# Altium PCB spider.PcbDoc
Units mm, origin at the board's own origin, x right, y up, seen from the top; angles counter-clockwise.
Board outline 30.2 x 24 mm, 2 copper layers (Top Layer, Bottom Layer), stack 1.601 mm thick; 61 components, 42 nets, 209 pads, 87 vias.
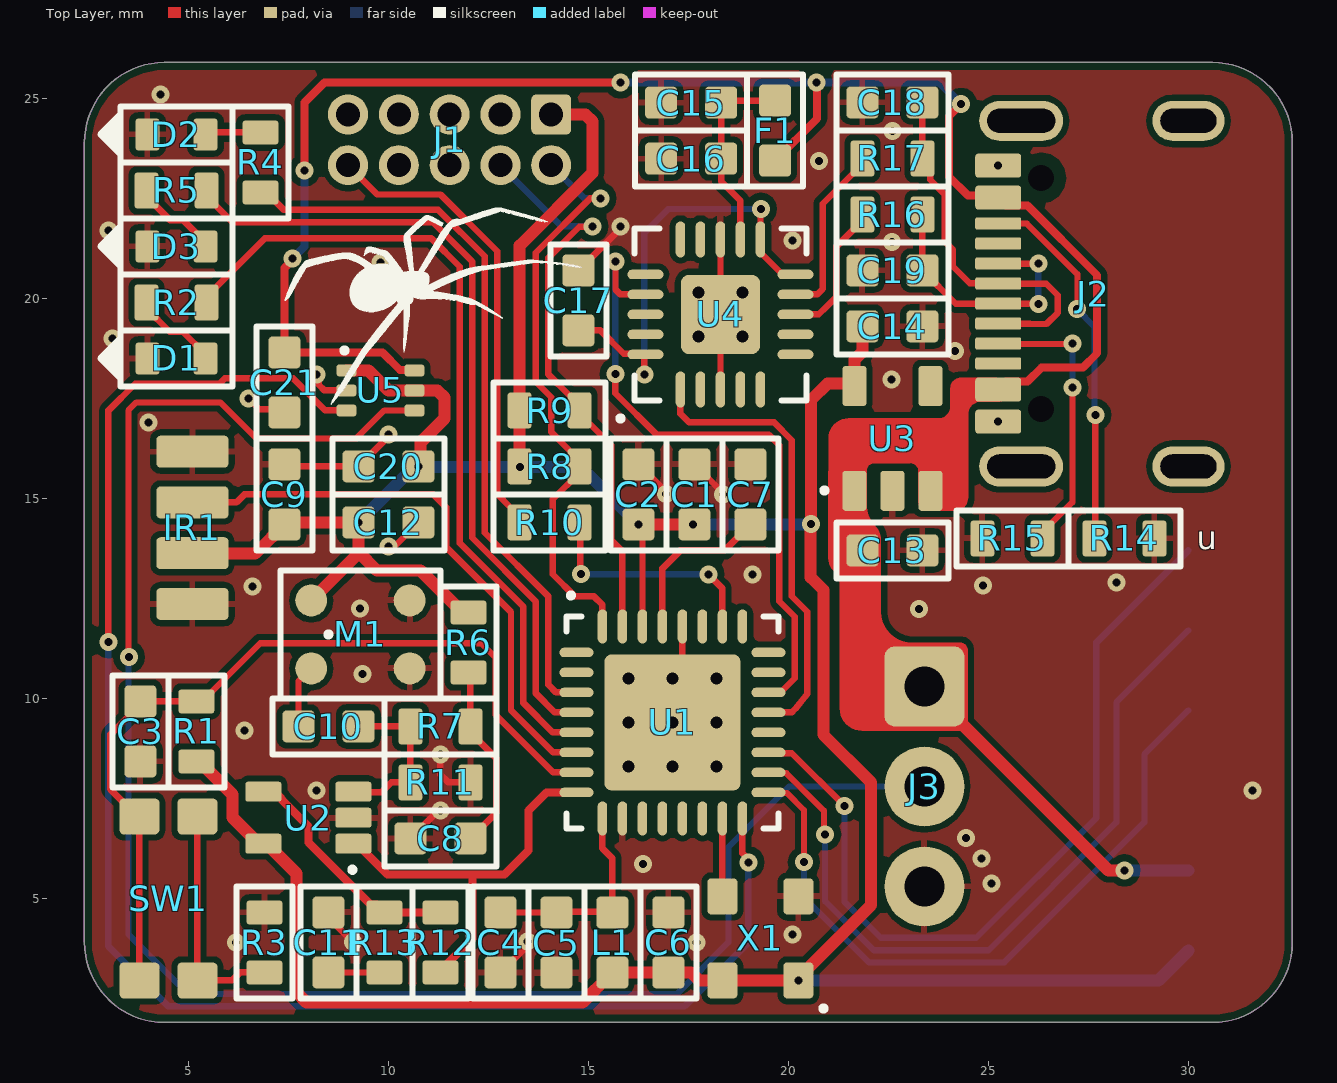
[diagram p0: Top Layer view]
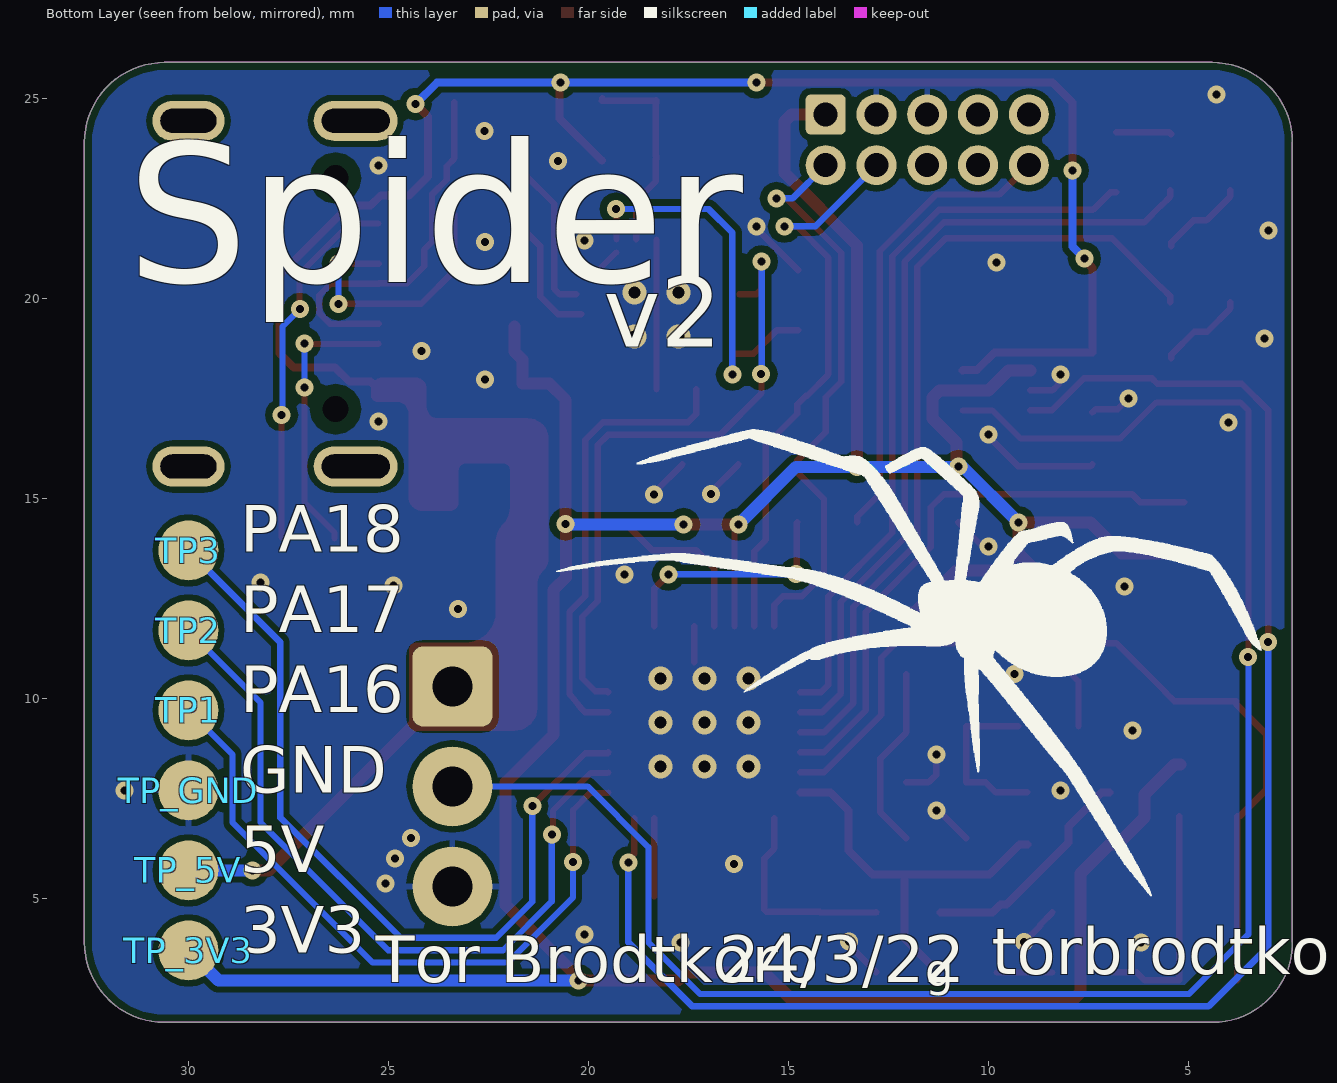
[diagram p1: Bottom Layer view, seen from below]
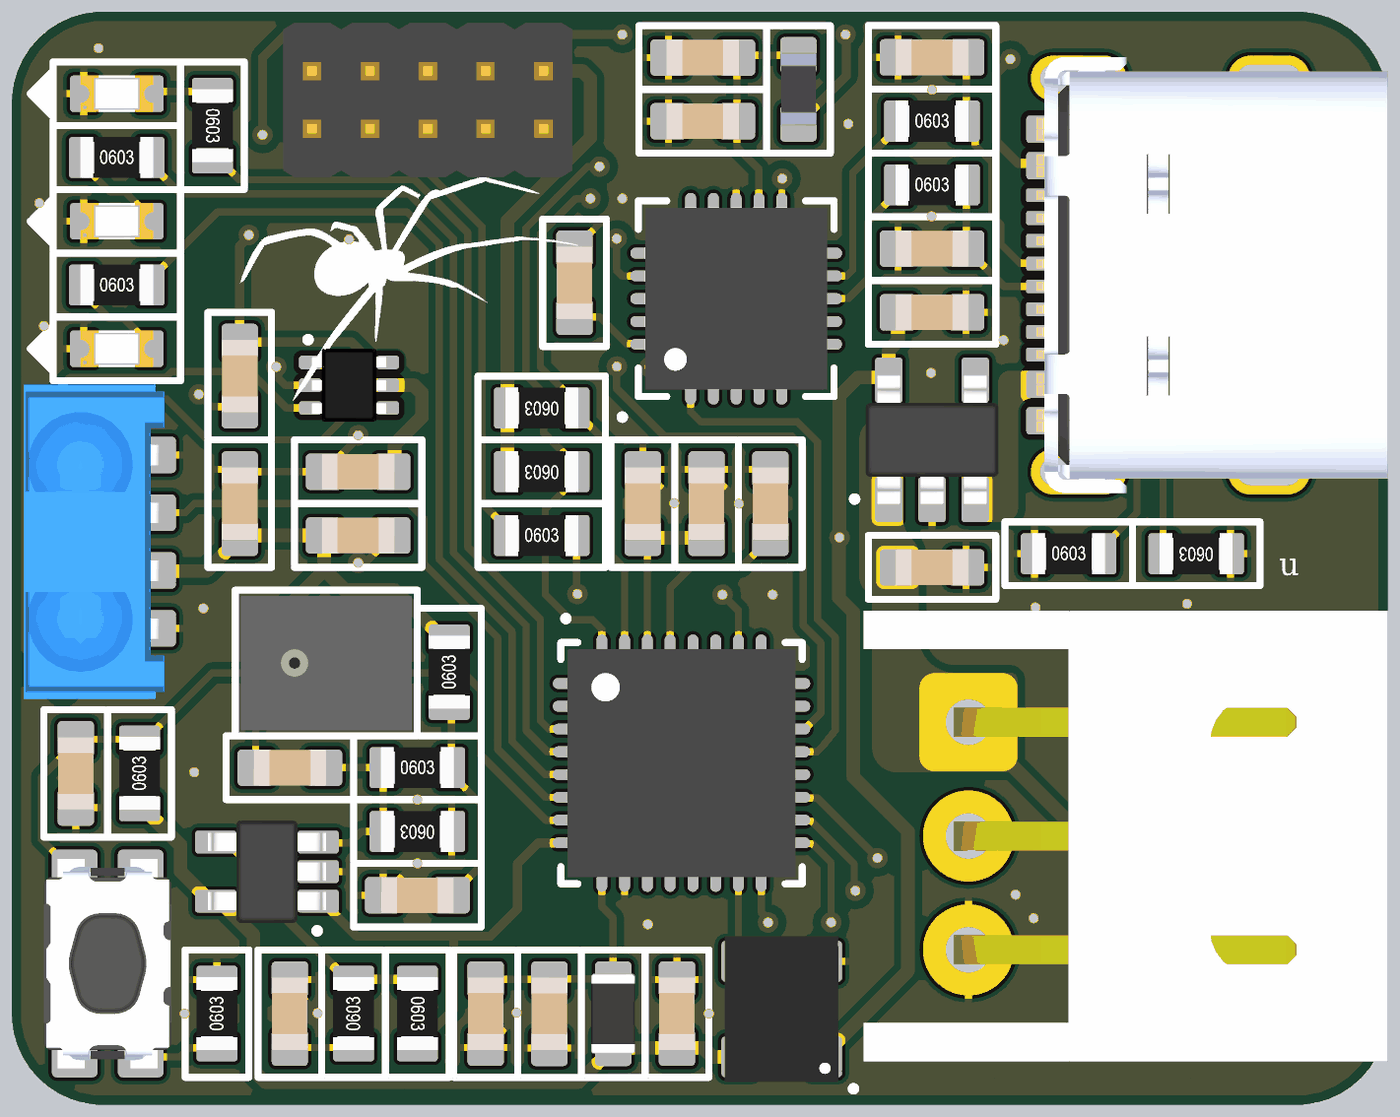
[diagram p2: 3D render of the assembled board from above, using the file's embedded part models]

## Layer stack, top to bottom
Top Solder: solder mask 0.0102, Solder Resist, Dk 3.5
Top Layer: signal copper 0.0356
Dielectric 1: dielectric 1.53, FR-4, Dk 4.8
Bottom Layer: signal copper 0.0356
Bottom Solder: solder mask 0.0102, Solder Resist, Dk 3.5

## Board outline
2.4,3.9 ccw(c4.4,3.9) 4.4,1.9 30.6,1.9 ccw(c30.6,3.9) 32.6,3.9 32.6,23.9 ccw(c30.6,23.9) 30.6,25.9 4.4,25.9 ccw(c4.4,23.9) 2.4,23.9

## Design rules (kind name [scope] priority, off if disabled: settings)
BoardOutlineClearance [All] p1: gap=0.198 ignorepadtopadclearanceinfootprint=FALSE except(0: Arc-SplitContinuation Track-SplitContinuation SMDPad-SplitContinuation THPad-SplitContinuation Via-SplitContinuation Fill-SplitContinuation Poly-SplitContinuation Region-SplitContinuation Text-SplitContinuation)
Clearance [All] p1: gap=0.152 ignorepadtopadclearanceinfootprint=TRUE except(0.305: Arc-Hole Track-Hole SMDPad-Hole THPad-Hole Via-Hole Fill-Hole Poly-Hole Region-Hole Text-Hole)
ComponentClearance [All] p1: gap=0.1 collisioncheckmode=3 verticalgap=0.1 showdistances=FALSE
DiffPairsRouting DiffPairsRouting_USB [InDifferentialPair('USB')] p1: maxlimit=0.5 minlimit=0.16 mostfreqgap=0.2 toplayer_minwidth=0.16 toplayer_maxwidth=5 toplayer_prefwidth=0.265 bottomlayer_minwidth=0.16 bottomlayer_maxwidth=5 bottomlayer_prefwidth=0.265 maxuncoupledlength=12.7
DiffPairsRouting DiffPairsRouting_ETH [InDifferentialPair('ETH_RX') or InDifferentialPair('ETH_TX')] p2: maxlimit=0.5 minlimit=0.16 mostfreqgap=0.194 toplayer_minwidth=0.16 toplayer_maxwidth=5 toplayer_prefwidth=0.22 bottomlayer_minwidth=0.16 bottomlayer_maxwidth=5 bottomlayer_prefwidth=0.22 maxuncoupledlength=12.7
DiffPairsRouting [All] p3: maxlimit=0.5 minlimit=0.16 mostfreqgap=0.3 toplayer_minwidth=0.16 toplayer_maxwidth=5 toplayer_prefwidth=0.3 bottomlayer_minwidth=0.16 bottomlayer_maxwidth=5 bottomlayer_prefwidth=0.3 maxuncoupledlength=12.7
HoleSize [All] p1: absolutevalues=TRUE maxlimit=6.3 minlimit=0.025 maxpercent=80.000 minpercent=20.000
MatchedLengths MatchedLengths_1 [InNetClass('RX')] p1: tolerance=2 checknetsindiffpair=FALSE checkdiffpairvsdiffpair=TRUE checkxsignals=TRUE checkothers=TRUE
MatchedLengths [InNetClass('TX')] p2: tolerance=2 checknetsindiffpair=FALSE checkdiffpairvsdiffpair=TRUE checkxsignals=TRUE checkothers=TRUE
MinimumAnnularRing [All] p1: minimumring=0.102
MinimumSolderMaskSliver [All] p1: minsoldermaskwidth=0.1
PlaneClearance [All] p1: clearance=0.1
PlaneConnect [All] p1: planeconnectstyle=Relief reliefexpansion=0.15 reliefentries=4 reliefconductorwidth=0.152 reliefairgap=0.2
PolygonConnect PolygonConnect_Via [IsVia] p1: connectstyle=Direct reliefconductorwidth=0.152 reliefentries=4 polygonreliefangle="90 Angle" airgapwidth=0.152
PolygonConnect [All] p2: connectstyle=Relief reliefconductorwidth=0.152 reliefentries=4 polygonreliefangle="90 Angle" airgapwidth=0.152
RoutingVias [All] p1: holewidth=0.3 width=0.6 viastyle="Through Hole" minholewidth=0.2 minwidth=0.45 maxholewidth=6.3 maxwidth=10
SilkToSilkClearance [All] p1: silktosilkclearance=0.152
SilkToSolderMaskClearance [IsPad] p1: minsilkscreentomaskgap=0.152 clearancetoexposedcopper=TRUE
SolderMaskExpansion [All] p1: expansion=0.076 istentingtop=FALSE
Width [All] p1: maxlimit=10 minlimit=0.152 preferedwidth=0.152 minimp=50.000000 maximp=50.000000 favimp=50.000000
22 further rules are at their usual default settings.

## Classes and differential pairs
differential pair USB: +USB_P -USB_N

## Components (designator, comment, footprint, x,y, rotation, side; value= is the part's Value field where it differs from the comment)
C1 "passive_5" "capacitor 0603" 17.65,15.1 r270 top value=10uF
C2 "passive_5" "capacitor 0603" 16.25,15.1 r270 top value=100nF
C3 "passive_5" "capacitor 0603" 3.8,9.176 r90 top value=1uF
C4 "passive_5" "capacitor 0603" 12.8,3.9 r90 top value=10uF
C5 "passive_5" "capacitor 0603" 14.2,3.899 r90 top value=100nF
C6 "passive_5" "capacitor 0603" 17,3.9 r270 top value=100nF
C7 "passive_5" "capacitor 0603" 19.05,15.1 r270 top value=1uF
C8 "passive_5" "capacitor 0603" 11.3,6.5 r0 top value=1uF
C9 "passive_5" "capacitor 0603" 7.4,15.1 r270 top value=1uF
C10 "passive_5" "capacitor 0603" 8.5,9.3 r180 top value=10uF
C11 "passive_5" "capacitor 0603" 8.5,3.9 r270 top value=1uF
C12 "passive_5" "capacitor 0603" 10,14.4 r180 top value=1uF
C13 "passive_5" "capacitor 0603" 22.6,13.7 r180 top value=100nF
C14 "passive_5" "capacitor 0603" 22.6,19.3 r180 top value=1uF
C15 "passive_5" "capacitor 0603" 17.567,24.896 r0 top value=4.7uF
C16 "passive_5" "capacitor 0603" 17.567,23.496 r0 top value=100nF
C17 "passive_5" "capacitor 0603" 14.75,19.95 r270 top value=100nF
C18 "passive_5" "capacitor 0603" 22.6,24.9 r0 top value=47pF
C19 "passive_5" "capacitor 0603" 22.6,20.7 r0 top value=47pF
C20 "passive_5" "capacitor 0603" 10,15.8 r0 top value=100nF
C21 "passive_5" "capacitor 0603" 7.4,17.9 r90 top value=100nF
D1 "LED White" "LED 0603 white" 4.7,18.5 r180 top
D2 "LED White" "LED 0603 white" 4.7,24.1 r180 top
D3 "LED White" "LED 0603 white" 4.7,21.3 r180 top
F1 "passive_8" "ferrit bead 0603" 19.667,24.196 r90 top value="480Ω @ 100MHz"
IR1 "sensor_1" TSSP77038TR 5.1,14.265 r90 top
J1 "Header 1.27mm" "header male 2x5, pitch 1.27mm" 11.53,23.965 r270 top
J2 "USB 2.0" USB4105-GF-A 27.623,20.12 r90 top locked
J3 "connector_41" "S3B-XH-A (LF)(SN)" 23.4,7.8 r270 top locked
L1 "passive_9" "inductor 0603" 15.6,3.899 r90 top value=10uH
M1 "MEMS Microphone" SPU0410HR5H-PB 9.3,11.6 r90 top
R1 "passive_2" "resistor 0603" 5.2,9.176 r90 top value=10kΩ
R2 "passive_2" "resistor 0603" 4.7,19.9 r0 top value=10kΩ
R3 "passive_2" "resistor 0603" 6.9,3.9 r90 top value=10kΩ
R4 "passive_2" "resistor 0603" 6.8,23.4 r270 top value=10kΩ
R5 "passive_2" "resistor 0603" 4.7,22.7 r0 top value=10kΩ
R6 "passive_2" "resistor 0603" 12,11.4 r90 top value=10kΩ
R7 "passive_2" "resistor 0603" 11.3,9.3 r0 top value=10kΩ
R8 "passive_2" "resistor 0603" 14.03,15.8 r180 top value=10kΩ
R9 "passive_2" "resistor 0603" 14.03,17.2 r180 top value=10kΩ
R10 "passive_2" "resistor 0603" 14.03,14.4 r0 top value=39Ω
R11 "passive_2" "resistor 0603" 11.3,7.9 r180 top value=10kΩ
R12 "passive_2" "resistor 0603" 11.3,3.9 r270 top value=39Ω
R13 "passive_2" "resistor 0603" 9.9,3.9 r90 top value=10kΩ
R14 "passive_2" "resistor 0603" 28.4,14 r180 top value=5.1kΩ
R15 "passive_2" "resistor 0603" 25.6,14 r0 top value=5.1kΩ
R16 "passive_2" "resistor 0603" 22.6,22.1 r0 top value=27Ω
R17 "passive_2" "resistor 0603" 22.6,23.5 r0 top value=27Ω
SW1 "connector_35" "KMR621NG LFS" 4.5,5 r90 top
TP1 "misc_3" "testpoint round, diameter 1.5mm" 30,9.7 r0 bottom
TP2 "misc_3" "testpoint round, diameter 1.5mm" 30,11.7 r0 bottom
TP3 "misc_3" "testpoint round, diameter 1.5mm" 30,13.7 r0 bottom
TP_3V3 "misc_3" "testpoint round, diameter 1.5mm" 30,3.7 r90 bottom
TP_5V "misc_3" "testpoint round, diameter 1.5mm" 30,5.7 r90 bottom
TP_GND "misc_3" "testpoint round, diameter 1.5mm" 30,7.7 r90 bottom
U1 "SAMD21" ATSAMD21E17D-MUT 17.1,9.4 r0 top
U2 "ic_6" MCP6241T-E/OT 7.998,7.018 r180 top
U3 "regulator_1" TCR2EF33,LM(CT 22.6,16.5 r90 top
U4 "FTDI" FT231XQ-R 18.3,19.6 r90 top locked
U5 "ic_10" 74LVC1T45Z6-7 9.8,17.7 r0 top
X1 "8 MHz" DSC6001CE2A-008.0000 19.3,4 r180 top

## Footprints (in the part's own frame and the unit in brackets; to place one, negate y for a bottom-side part, rotate by r counter-clockwise, add the part's x,y. Pads: shape width x height; smd on the part's side, far side on the other; paste and mask are expansions set on the pad)
74LVC1T45Z6-7 [mm] "SON, 6-Leads, Body 1.60x1.18mm, Pitch 0.50mm, IPC Medium Density"
  rrect50% 0.5x0.3 smd mask+0.12: 1(-0.85,0.5) 2(-0.85,0) 3(-0.85,-0.5) 4(0.85,-0.5) 5(0.85,0) 6(0.85,0.5)
  silkscreen extent -0.95,0.95 -0.85,1.05, body extent -0.81,-0.8 0.81,0.8, height 0.58
ATSAMD21E17D-MUT [mm] "QFN, 32-Leads, Body 5.00x5.00mm, Pitch 0.50mm, Thermal Pad 3.60x3.60mm, IPC Medium Density"
  oval 0.85x0.24 smd: 1(-2.4,1.75) 2(-2.4,1.25) 3(-2.4,0.75) 4(-2.4,0.25) 5(-2.4,-0.25) 6(-2.4,-0.75) 7(-2.4,-1.25) 8(-2.4,-1.75) 17(2.4,-1.75) 18(2.4,-1.25) 19(2.4,-0.75) 20(2.4,-0.25) 21(2.4,0.25) 22(2.4,0.75) 23(2.4,1.25) 24(2.4,1.75)
  oval 0.24x0.85 smd: 9(-1.75,-2.4) 10(-1.25,-2.4) 11(-0.75,-2.4) 12(-0.25,-2.4) 13(0.25,-2.4) 14(0.75,-2.4) 15(1.25,-2.4) 16(1.75,-2.4) 25(1.75,2.4) 26(1.25,2.4) 27(0.75,2.4) 28(0.25,2.4) 29(-0.25,2.4) 30(-0.75,2.4) 31(-1.25,2.4) 32(-1.75,2.4)
  rrect10% 3.4x3.4 smd: 33(0,0)
  silkscreen extent -2.65,-2.65 2.65,3.22, body extent -2.5,-2.5 2.5,2.5, height 1
"capacitor 0603" [mm]
  rrect25% 0.8x0.8 smd: 1(-0.75,0) 2(0.75,0)
  silkscreen extent -1.4,-0.7 1.4,0.7, body extent -0.8,-0.4 0.8,0.4, height 0.8
DSC6001CE2A-008.0000 [mm]
  rrect25% 0.75x0.9 smd: 1(-0.95,1.05) 2(-0.95,-1.05) 3(0.95,-1.05) 4(0.95,1.05)
  silkscreen extent -1.62,1.7 -1.53,1.8, body extent -1.25,-1.6 1.25,1.6, height 0.85
"ferrit bead 0603" [mm]
  rrect25% 0.8x0.8 smd: 1(-0.75,0) 2(0.75,0)
  silkscreen extent -1.4,-0.7 1.4,0.7, body extent -0.79,-0.4 0.81,0.4, height 0.8
FT231XQ-R [mm] "QFN, 20-Leads, Body 4.00x4.00mm, Pitch 0.50mm, Thermal Pad 1.98x1.98mm, IPC Medium Density"
  oval 0.9x0.24 smd: 1(-1.875,1) 2(-1.875,0.5) 3(-1.875,0) 4(-1.875,-0.5) 5(-1.875,-1) 11(1.875,-1) 12(1.875,-0.5) 13(1.875,0) 14(1.875,0.5) 15(1.875,1)
  oval 0.24x0.9 smd: 6(-1,-1.875) 7(-0.5,-1.875) 8(0,-1.875) 9(0.5,-1.875) 10(1,-1.875) 16(1,1.875) 17(0.5,1.875) 18(0,1.875) 19(-0.5,1.875) 20(-1,1.875)
  rrect20% 1.98x1.98 smd: 21(0,0)
  silkscreen extent -2.65,-2.15 2.15,2.55, body extent -2,-2 2,2, height 0.8
"header male 2x5, pitch 1.27mm" [mm]
  rrect25% 1x1 hole 0.6: 1(-0.635,2.54)
  round 1 hole 0.6: 2(0.635,2.54) 3(-0.635,1.27) 4(0.635,1.27) 5(-0.635,0) 6(0.635,0) 7(-0.635,-1.27) 8(0.635,-1.27) 9(-0.635,-2.54) 10(0.635,-2.54)
  body extent -1.7,-3.17 1.7,3.17, height 5.35
"inductor 0603" [mm]
  rrect25% 0.8x0.8 smd: 1(-0.75,0) 2(0.75,0)
  silkscreen extent -1.4,-0.7 1.4,0.7, body extent -0.87,-0.48 0.87,0.48, height 0.91
"KMR621NG LFS" [mm]
  rrect25% 0.9x1 smd: 1(-2.05,0.725) 1(2.05,0.725) 2(-2.05,-0.725) 2(2.05,-0.725)
  body extent -2.3,-1.4 2.3,1.4, height 1.9
"LED 0603 white" [mm]
  rrect25% 0.6x0.8 smd: 1(-0.725,0) 2(0.725,0)
  silkscreen extent -1.4,-0.7 1.9,0.7, body extent -0.8,-0.4 0.8,0.4, height 0.6
MCP6241T-E/OT [mm] "SOT23, 5-Leads, Body 2.03x2.10mm, Pitch 0.65mm, IPC Medium Density"
  rrect25% 0.9x0.5 smd: 1(-1.125,0.65) 2(-1.125,0) 3(-1.125,-0.65) 4(1.125,-0.65) 5(1.125,0.65)
  silkscreen extent -1.15,1.25 -1.05,1.35, body extent -1.3,-1.12 1.3,1.12, height 1.1
"resistor 0603" [mm]
  rrect25% 0.6x0.9 smd: 1(-0.75,0) 2(0.75,0)
  silkscreen extent -1.4,-0.7 1.4,0.7, body extent -0.8,-0.45 0.8,0.45, height 0.5
"S3B-XH-A (LF)(SN)" [mm]
  rrect25% 2x2 hole 1: 1(-2.5,0)
  round 2 hole 1: 2(0,0) 3(2.5,0)
  body extent -4.95,-2.3 4.95,9.2, height 6.1
SPU0410HR5H-PB [mm]
  round 0.8 smd: 1(0.85,1.23) 2(0.85,-1.23) 3(-0.85,-1.23) 4(-0.85,1.23)
  silkscreen extent -1.6,-2 1.6,2, body extent -1.47,-1.88 1.48,1.88, height 1.1
TCR2EF33,LM(CT [mm] "SOT23, 5-Leads, Body 2.90x2.80mm, Pitch 0.95mm, IPC Medium Density"
  rrect25% 1x0.6 smd: 1(-1.31,0.95) 2(-1.31,0) 3(-1.31,-0.95) 4(1.31,-0.95) 5(1.31,0.95)
  silkscreen extent -1.35,1.65 -1.25,1.75, body extent -1.41,-1.46 1.41,1.46, height 1.12
"testpoint round, diameter 1.5mm" [mm]
  round 1.5 smd: 1(0,0)
TSSP77038TR [mm]
  rrect25% 0.8x1.8 smd: 1(-1.905,0) 2(-0.635,0) 3(0.635,0) 4(1.905,0)
  body extent -3.46,-0.65 3.44,2.45, height 3.21
USB4105-GF-A [mm]
  rrect25% 0.6x1.15 smd mask+0.12: A1_B12(-3.2,2.378) A4_B9(-2.4,2.378) B1_A12(3.2,2.378) B4_A9(2.4,2.378)
  rrect25% 0.3x1.15 smd mask+0.12: A5(-1.25,2.378) A6(-0.25,2.378) A7(0.25,2.378) A8(1.25,2.378) B5(1.75,2.378) B6(0.75,2.378) B7(-0.75,2.378) B8(-1.75,2.378)
  oval 1x1.8 hole 0.6 slot 1.4 at 90 deg mask+0.076: SHELL(-4.32,-2.377) SHELL(4.32,-2.377)
  oval 1x2.1 hole 0.6 slot 1.7 at 90 deg mask+0.076: SHELL(-4.32,1.803) SHELL(4.32,1.803)
  round 0 hole 0.65 mask+0.076: ""(-2.89,1.303) ""(2.89,1.303)
  body extent -4.79,-4.98 4.79,2.73, height 3.31

## Part data
C1 C2 C3 C4 C5 C6 C7 C8 C9 C10 C11 C12 C13 C14 C15 C16 C17 C18 C19 C20 C21: "Capacitor 0603"
D1 D2 D3: library part diode_6, "LED 0603 white"
F1: "Ferrite bead 0603"
IR1: "IR receiver, 38 kHz, 40m, SMD", Manufacturer 1="Vishay Semiconductor Opto Division", Manufacturer Part Number 1=TSSP77038TR, Supplier Part Number 1=TSSP77038TRCT-ND, Supplier 1=Digi-Key
J1: library part connector_17, "Header male 2x5, pitch 1.27mm"
J2: library part connector_35, "USB-C (2.0)", Manufacturer 1=GCT, Manufacturer Part Number 1=USB4105-GF-A, Supplier Part Number 1=2073-USB4105-GF-ACT-ND, Link=https://www.digikey.no/product-detail/no/gct/USB4105-GF-A/2073-USB4105-GF-ACT-ND/11198510, Supplier 1=Digi-Key
J3: "JST connector 1x3, pitch 2.5mm, right angle, TH", Manufacturer 1="JST (JAPAN SOLDERLESS TERMINALS)", Manufacturer Part Number 1="S3B-XH-A (LF)(SN)", Supplier Part Number 1=1516290, Link=https://no.farnell.com/jst-japan-solderless-terminals/s3b-xh-a-lf-sn/header-right-angle-3way/dp/1516290?st=jst, Supplier 1=Farnell
L1: "Inductor 0603"
M1: library part sensor_2, "Microphone, MEMS, 100 Hz - 10 kHz, 3.3V,  SMD", Manufacturer 1=Knowles, Manufacturer Part Number 1=SPU0410HR5H-PB, Supplier Part Number 1=423-1138-1-ND, Supplier 1=Digi-Key
R1 R2 R3 R4 R5 R6 R7 R8 R9 R10 R11 R12 R13 R14 R15 R16 R17: "Resistor 0603"
SW1: "Tactile switch SMD, tiny", Manufacturer 1=C&K, Manufacturer Part Number 1="KMR621NG LFS", Supplier Part Number 1=CKN10684CT-ND, Link=https://www.digikey.no/product-detail/en/c-k/KMR621NG-LFS/CKN10684CT-ND/6035356, Supplier 1=Digi-Key
TP1 TP2 TP3 TP_3V3 TP_5V TP_GND: "Test-point round, diameter 1.5mm"
U1: library part cpu_0, "SAMD21, 48 MHz, 128KB flash, 16KB RAM, 32 pins, USB device, QFN", Manufacturer 1="Microchip Technology", Manufacturer Part Number 1=ATSAMD21E17D-MUT, Supplier Part Number 1=ATSAMD21E17D-MUTTR-ND, Link=https://www.digikey.no/products/no?keywords=ATSAMD21E17D-MUTTR-ND, Supplier 1=Digi-Key
U2: "OpAmp, 1 circuit, rail-to-rail, single supply, 1.8V to 5V, SOT23-5", Manufacturer 1="Microchip Technology", Manufacturer Part Number 1=MCP6241T-E/OT, Supplier Part Number 1=MCP6241T-E/OTCT-ND, Supplier 1=Digi-Key
U3: "LDO fixed, 3.3V output, 0.2V dropout, 200mA", Current=200mA, Manufacturer 1="Toshiba Semiconductor and Storage", Manufacturer Part Number 1=TCR2EF33,LM(CT, Output voltage=3.3V, Supplier Part Number 1=TCR2EF33LM(CTCT-ND, Dropout=0.2V, Link=https://www.digikey.no/product-detail/en/toshiba-semiconductor-and-storage/TCR2EF33-LM-CT/TCR2EF33LM-CTCT-ND/4503328, Supplier 1=Digi-Key
U4: library part ic_1, "USB to UART converter, FTDI, single, 20 pins, QFN", Manufacturer 1="FTDI, Future Technology Devices International Ltd", Manufacturer Part Number 1=FT231XQ-R, Supplier Part Number 1=768-1128-1-ND, Supplier 1=Digi-Key
U5: "Level shifter, bidirectional, 1.65V - 5V, SOT-563", Manufacturer 1="Diodes Incorporated", Manufacturer Part Number 1=74LVC1T45Z6-7, Supplier Part Number 1=74LVC1T45Z6-7DITR-ND, Link=https://www.digikey.no/en/products/detail/diodes-incorporated/74LVC1T45Z6-7/4898825, Supplier 1=Digi-Key
X1: library part oscillator_2, "Oscillator, 8MHz, 3.3V, 3.2mm x 2.5mm", Manufacturer 1="Microchip Technology", Manufacturer Part Number 1=DSC6001CE2A-008.0000, Supplier Part Number 1=DSC6001CE2A-008.0000-ND, Link=https://www.digikey.com/en/products/detail/microchip-technology/DSC6001CE2A-008-0000/7732669, Supplier 1=Digi-Key

## Via types
v1: diameter 0.45, hole 0.2, Top Layer to Bottom Layer, tented both sides, 74 vias
v2: diameter 0.6, hole 0.3, Top Layer to Bottom Layer, tented bottom, 13 vias

## Nets (pads, with @x,y where several pads share a name; then routed paths per layer and width w, separated by ;. In a path a pad name is that pad's centre, name@x,y a point inside that pad or via, vN(x,y) a via of type N, cw(c..) or ccw(c..) an arc to the next point about the centre after c; other vN are vias at no path point)
3V3: C1.2 C2.2 C6.2 C9.2 C12.2 C14.2 C20.2 IR1.2 J1.1 L1.1 M1.1 R1.1 R6.2 R8.2 R9.2 TP_3V3.1 U1.30 U2.5 U3.5 U5.1 U5.5 X1.1 X1.4 | length 89.2
  Top Layer w0.152: v1(16.25,14.35) 16.35,14.25 U1.30
  Top Layer w0.3: IR1.2 5.11,13.62 6.67,13.62 7.45,14.4 v1(9.25,14.4) 9.25,13.66 9.71,13.2 10.8,13.2 11.85,12.15 R6.2 ; R1.1@5.2,8.35 5.35,8.35 6.1,7.6 6.1,7.025 6.775,6.35 6.975,6.35 7.7,5.625 7.7,2.652 7.952,2.4 14.85,2.4 15.534,3.084 15.6,3.084 15.667,3.15 C6.2 17.57,3.15 17.77,2.95 X1.4 v1(20.25,2.95) 20.25,3.018 22.07,4.838 22.07,7.899 20.873,9.096 20.873,12.713 20.556,13.03 20.556,14.345 v1(20.569,14.358) 20.569,17.463 20.975,17.869 21.649,17.869 21.65,17.87 21.65,18.47 21.85,18.67 C14.2 ; M1.1 9.25,13.63 ; U5.1 9.5,18.2 10,17.7 11.224,17.7 11.4,17.524 11.4,17 10.8,16.4 10.8,15.85 v1(10.75,15.8) ; v1(13.29,15.79) R8.2 13.28,21.318 15.1,23.138 15.1,24.424 14.924,24.6 J1.1 ; v1(16.25,14.35) v1(17.62,14.35)
  Bottom Layer w0.3: v1(9.25,14.4) v1@10.64,15.79 ; v1@10.75,15.79 v1(13.29,15.79) 14.81,15.79 v1(16.25,14.35) ; v1(17.62,14.35) 20.561,14.35 v1(20.569,14.358) ; v1(20.25,2.95) 29.25,2.95 TP_3V3.1
5V: C13.2 C21.2 F1.1 J2.A4_B9 J2.B4_A9 J3.1 TP_5V.1 U3.1 U3.3 U5.6 | length 49.1
  Top Layer w0.2: v1(7.6,21) 7.6,20.958 7.4,20.758 C21.2 9.85,18.65 10.285,18.215 10.635,18.215 U5.6 ; v1(7.9,23.2) 7.9,24.9 8.4,25.4 v1(15.8,25.4) ; F1.1 20.72,24.499 20.72,25.38 v1(20.7,25.4) ; v1(24.32,24.86) 24.01,24.55 24.01,23.05 24.487,22.573 25.192,22.573 25.445,22.32 25.978,22.32 27.72,20.578 27.72,18.63 27.365,18.275 26.333,18.275 25.978,17.92 25.445,17.92 J2.A4_B9
  Top Layer w0.3: J3.1 28,5.7 v1(28.4,5.7)
  Bottom Layer w0.2: v1(7.6,21) 7.9,21.3 v1(7.9,23.2) ; v1(15.8,25.4) 23.78,25.4 v1(24.32,24.86)
  Bottom Layer w0.3: v1(28.4,5.7) TP_5V.1
BUTTON: C3.2 R1.2 SW1.1 U1.7 | length 21.2
  Top Layer w0.16: SW1.1@3.775,2.95 3.775,7.05 3.725,7.05 3.05,7.725 3.05,9.1 C3.2@3.8,9.85 ; C3.2 5.35,9.926 5.57,10.146 5.57,10.155 6.797,11.382 12.318,11.382 12.682,11.018 12.682,9.588 14.12,8.15 U1.7
GND: C1.1 C2.1 C3.1 C4.1 C5.1 C6.1 C7.1 C8.1 C9.1 C11.1 C12.1 C13.1 C14.1 C15.1 C16.1 C17.1 C18.1 C19.1 C20.1 C21.1 D1.2 D2.2 D3.2 IR1.1 IR1.4 J1.3 J1.5 J2.A1_B12 J2.B1_A12 J3.3 M1.2 M1.3 R3.2 R11.1 R14.1 R15.1 TP_GND.1 U1.10 U1.28 U1.33 U2.2 U3.2 U4.3 U4.13 U4.21 U5.2 X1.2 | length 18.8
  Top Layer w0.152: U4.3 U4.21 U4.13
  Top Layer w0.16: v1(6.5,17.5) 6.771,17.229 7.321,17.229 C21.1 ; C9.1 7.45,15.8 C20.1 10,16.55 v1(10,16.6) ; v1(8.203,18.103) 8.258,18.047 8.258,17.842 8.4,17.7 U5.2 ; C11.1@8.4,4.65 8.708,4.342 8.708,4.312 v1(9.11,3.91) ; v1(10,13.8) 10.055,13.855 10.205,13.855 C12.1 ; C8.1 11.25,7.2 v1(11.3,7.2) ; v1(11.3,8.6) 11.3,8.094 11.394,8 11.4,8 11.5,7.9 R11.1 ; C4.1 13.425,3.775 13.425,3.865 v1(13.48,3.92) ; C17.1 15.8,21.75 v1(15.8,21.8) ; C2.1 16.94,15.16 v1(16.94,15.11) ; U1.33@17.35,10.9 U1.28 ; C1.1 18.36,15.14 v1(18.36,15.1)
  other v1: 6.19,3.9 17.7,3.9 20.1,4.1 25.078,5.375 16.36,5.86 24.831,5.994 24.433,6.513 8.2,7.7 31.6,7.7 6.4,9.2 9.35,10.61 23.26,12.24 9.29,12.25 6.6,12.8 24.87,12.82 28.2,12.9 19.1,13.1 4,16.9 25.245,16.92 22.58,17.97 24.17,18.69 3.1,19 9.8,20.9 22.59,21.41 20.1,21.45 3,21.7 25.245,23.32 20.76,23.44 22.6,24.19 4.3,25.1
  other v2: 16,8.3 17.1,8.3 18.2,8.3 16,9.4 17.1,9.4 18.2,9.4 16,10.5 17.1,10.5 18.2,10.5 17.75,19.05 18.85,19.05 17.75,20.15 18.85,20.15
IR: IR1.3 U1.6 | length 14.4
  Top Layer w0.16: IR1.3 6.2,14.9 6.4,15.1 11.12,15.1 11.44,14.78 11.44,13.784 13.063,12.162 13.063,9.707 14.12,8.65 U1.6
LED1: R2.2 U1.5 | length 20.6
  Top Layer w0.16: R2.2 5.45,20.05 5.67,20.27 5.677,20.27 6.907,21.5 11.075,21.5 11.782,20.792 11.782,13.884 13.375,12.291 13.375,9.885 14.11,9.15 U1.5
LED2: R4.2 U1.3 | length 18.4
  Top Layer w0.16: R4.2 6.95,22.65 7.388,22.212 11.246,22.212 12.407,21.051 12.407,14.143 14,12.55 14,10.34 14.19,10.15 U1.3
LED3: R5.2 U1.4 | length 20.1
  Top Layer w0.16: R5.2 5.45,22.55 5.67,22.33 5.677,22.33 6.107,21.9 11.116,21.9 12.095,20.922 12.095,14.013 13.688,12.421 13.688,10.122 14.16,9.65 U1.4
LED_3V: U1.16 U5.3 | length 40.5
  Top Layer w0.16: v1(3.006,11.411) 3,11.417 3,17.2 3.668,17.868 5.777,17.868 5.91,18 7.62,18 8.42,17.2 U5.3 ; U1.16 18.85,6.128 19,5.978 v1(19,5.9)
  Bottom Layer w0.16: v1(3.006,11.411) 3,11.405 3,3.8 4.5,2.3 17.4,2.3 19,3.9 v1(19,5.9)
LED_5V: J3.2 U5.4 | length 45.1
  Top Layer w0.152: v1(3.512,11.036) 3.5,11.048 3.5,17.2 3.7,17.4 5.8,17.4 6.7,16.5 9.2,16.5 9.9,17.2 U5.4
  Bottom Layer w0.152: v1(3.512,11.036) 3.5,11.024 3.5,4.1 4.991,2.609 17.209,2.609 18.5,3.9 18.5,6.28 20.02,7.8 J3.2
NetC4_2: C4.2 C5.2 L1.2 U1.9 | length 5.2
  Top Layer w0.16: C4.2 C5.2@14.199,4.649 ; C5.2 14.218,4.666 15.553,4.666 15.6,4.714 15.6,6 15.35,6.25 U1.9
NetC8_2: C8.2 R6.1 R7.2 | length 4.6
  Top Layer w0.16: C8.2 12.7,7.15 12.7,8.5 12.05,9.15 R7.2 R6.1@12.05,10.6
NetC10_1: C10.1 R7.1 R11.2 U2.3 | length 4.3
  Top Layer w0.16: U2.3@9.025,7.65 9.82,7.65 10.07,7.9 R11.2 R7.1 C10.1
NetC10_2: C10.2 M1.4 | length 1.6
  Top Layer w0.152: C10.2 7.75,10.43 M1.4
NetC11_2: C11.2 R13.1 | length 1.4
  Top Layer w0.152: C11.2@8.4,3.15 R13.1@9.8,3.15
NetC15_2: C15.2 C16.2 F1.2 U4.12 | length 5.1
  Top Layer w0.16: C16.2@18.3,23.496 18.3,23.55 18.317,23.567 C15.2 ; C15.2@18.3,24.896 18.3,24.95 18.304,24.946 F1.2 ; C16.2 18.317,22.923 18.8,22.44 U4.12 ; F1.2@19.631,24.982 F1.2@19.65,25
NetC17_2: C17.2 U4.10 U4.11 U4.20 | length 11
  Top Layer w0.152: U4.11@19.3,21.15 19.85,20.6 U4.10 ; U4.11 19.3,22.227 v1(19.31,22.237)
  Top Layer w0.16: C17.2 15.3,19.2 15.883,18.617 16.383,18.617 16.4,18.6 v1(16.4,18.1)
  Bottom Layer w0.16: v1(16.4,18.1) 16.4,21.64 16.997,22.237 v1(19.31,22.237)
NetD1_1: D1.1 R2.1 | length 2.2
  Top Layer w0.16: R2.1 3.95,19.75 4.53,19.17 4.855,19.17 5.425,18.6 D1.1
NetD2_1: D2.1 R4.1 | length 1.4
  Top Layer w0.16: D2.1 5.475,24.15 R4.1
NetD3_1: D3.1 R5.1 | length 2.2
  Top Layer w0.16: R5.1 3.95,22.55 4.55,21.95 4.875,21.95 5.425,21.4 D3.1
NetJ1_2: J1.2 R8.1 U1.32 | length 14.6
  Top Layer w0.16: v1(15.3,22.5) 15.038,22.5 13.682,21.145 13.682,17.918 14.07,17.53 14.07,16.66 14.56,16.17 14.78,15.95 R8.1 14.78,15.65 14.11,14.98 14.11,13.104 14.664,12.55 15.14,12.55 15.35,12.34 U1.32
  Bottom Layer w0.16: J1.2 14.9,22.5 v1(15.3,22.5)
NetJ1_4: J1.4 R9.1 U1.31 | length 14.4
  Top Layer w0.16: v1(15.1,21.8) 15.091,21.791 14.771,21.791 14,21.02 14,18.1 14.53,17.57 14.56,17.57 14.78,17.35 14.78,17.12 15.568,16.332 15.568,13.962 15.85,13.68 U1.31
  Bottom Layer w0.16: J1.4 14.33,21.8 v1(15.1,21.8)
NetJ1_10: J1.10 R10.1 | length 11.6
  Top Layer w0.16: J1.10 9.722,22.598 11.302,22.598 12.72,21.18 12.72,15.11 13.06,14.77 13.28,14.55 R10.1
NetJ2_A5: J2.A5 R15.2 | length 7
  Top Layer w0.152: J2.A5 25.254,18.861 27.091,18.861 v1(27.1,18.87) ; R15.2 26.35,14.15 27.1,14.9 v1(27.1,17.77)
  Bottom Layer w0.152: v1(27.1,17.77) v1(27.1,18.87)
NetJ2_B5: J2.B5 R14.2 | length 9.3
  Top Layer w0.152: J2.B5 25.963,21.87 27.225,20.608 27.225,19.74 v1(27.215,19.73) ; R14.2 27.671,14.021 v1(27.671,17.09)
  Bottom Layer w0.152: v1(27.215,19.73) 27.65,19.295 27.65,17.111 v1(27.671,17.09)
NetR3_1: R3.1 SW1.2 | length 5.9
  Top Layer w0.16: SW1.2@5.225,7.05 5.225,2.95 6.09,2.95 6.29,3.15 R3.1
NetR10_2: R10.2 U1.26 | length 5.9
  Top Layer w0.16: R10.2 14.797,14.383 14.797,13.131 v1(14.814,13.114) ; v1(18,13.1) 18.35,12.75 U1.26
  Bottom Layer w0.16: v1(14.814,13.114) 14.821,13.107 17.993,13.107 v1(18,13.1)
NetR12_1: R12.1 R13.2 U2.4 | length 5.7
  Top Layer w0.2: U2.4@6.975,7.65 7.175,7.65 7.325,7.5 7.325,7.475 8,6.8 8,6.4 9.55,4.85 9.7,4.85 R13.2 R12.1@11.2,4.65
NetR16_1: R16.1 U4.8 | length 3.5
  Top Layer w0.16: U4.8 20.18,19.605 20.761,19.605 20.944,19.788 21.2,20.044 21.2,21.3 21.85,21.95 R16.1
NetR17_1: R17.1 U4.9 | length 4.3
  Top Layer w0.16: U4.9@20.3,20.1 20.72,20.1 20.857,20.237 20.857,22.365 21.623,23.13 21.63,23.13 21.85,23.35 R17.1
NetTP1_1: TP1.1 U1.17 | length 17.1
  Top Layer w0.152: U1.17 19.519,7.631 19.965,7.631 20.385,7.211 v1(20.385,5.905)
  Bottom Layer w0.152: v1(20.385,5.905) 20.385,5.025 22.01,3.4 25.4,3.4 28.9,6.9 28.9,8.6 TP1.1
NetTP2_1: TP2.1 U1.18 | length 18.7
  Top Layer w0.152: U1.18 19.519,8.131 19.95,8.131 20.888,7.193 20.888,6.627 v1(20.916,6.599)
  Bottom Layer w0.152: v1(20.916,6.599) 20.916,4.925 22.136,3.705 25.005,3.705 28.2,6.9 28.2,9.9 TP2.1
NetTP3_1: TP3.1 U1.19 | length 20.4
  Top Layer w0.16: U1.19 19.517,8.633 20.083,8.633 v1(21.401,7.315)
  Bottom Layer w0.16: v1(21.401,7.315) 21.401,4.917 22.305,4.013 24.696,4.013 27.7,7.017 27.7,11.4 TP3.1
NetU1_15: U1.15 X1.3 | length 2
  Top Layer w0.16: X1.3 U1.15
PA10: U1.13
PA11: U1.14
SOUND: R12.2 U1.8 U2.1 | length 10.2
  Top Layer w0.2: U2.1@9.025,6.35 9.225,6.35 9.975,5.6 12.1,5.6 ; R12.2@11.25,3.15 12.1,4 12.1,5.6 ; U1.8 13.95,7.65 13.5,7.2 13.5,6.2 12.9,5.6 12.1,5.6
UART_RX: U1.22 U4.17 | length 16
  Top Layer w0.16: v1(15.676,20.918) 15.676,20.224 15.8,20.1 U4.17@16.223,20.1 ; v1(15.68,18.11) 15.674,18.104 15.674,17.626 16.712,16.588 19.512,16.588 19.772,16.328 19.772,12.426 20.157,12.041 20.157,10.502 19.831,10.176 19.526,10.176 U1.22
  Bottom Layer w0.16: v1(15.676,20.918) 15.67,20.912 15.67,18.12 v1(15.68,18.11)
UART_TX: U1.21 U4.1 | length 11.4
  Top Layer w0.16: U4.1 17.3,17.12 17.52,16.9 19.642,16.9 20.084,16.458 20.084,12.556 20.474,12.166 20.474,10.115 20.438,10.071 20.174,9.744 20.08,9.65 U1.21
USB_N: C18.2 J2.A7 J2.B7 R17.2 | length 9.4
  Top Layer w0.16: C18.2 R17.2 23.543,23.307 23.543,22.967 23.91,22.6 23.91,21.42 24.107,21.223 24.107,20.803 24.531,20.379 25.236,20.379 J2.A7 26.443,20.37 26.73,20.082 26.73,19.638 26.453,19.36 26.038,19.36 26.028,19.37 J2.B7
USB_P: C19.2 J2.A6 J2.B6 R16.2 | length 6.6
  Top Layer w0.16: C19.2 24.18,19.87 J2.A6 26.236,19.87 v1(26.246,19.86) ; C19.2@23.35,20.75 R16.2 ; J2.B6 v1(26.25,20.87)
  Bottom Layer w0.16: v1(26.246,19.86) 26.248,19.862 26.248,20.868 v1(26.25,20.87)
VDDCORE: C7.2 U1.29 | length 4.1
  Top Layer w0.16: U1.29 16.85,13.25 17.3,13.7 18.4,13.7 C7.2
pads on no net: J1.6 J1.7 J1.8 J1.9 J2. J2.A8 J2.B8 J2.SHELL U1.1 U1.2 U1.11 U1.12 U1.20 U1.23 U1.24 U1.25 U1.27 U3.4 U4.2 U4.4 U4.5 U4.6 U4.7 U4.14 U4.15 U4.16 U4.18 U4.19

## Polygon pours and split planes (outlines as drawn)
GND on Bottom Layer "BOTTOM GND" (solid, remove dead copper, pour order 1): 2.4,3.9 ccw(c4.4,3.9) 4.4,1.9 30.6,1.9 ccw(c30.6,3.9) 32.6,3.9 32.6,23.9 ccw(c30.6,23.9) 30.6,25.9 4.4,25.9 ccw(c4.4,23.9) 2.4,23.9
GND on Top Layer "GND_L01_P000" (solid, remove dead copper, pour order 0): 2.4,3.9 ccw(c4.4,3.9) 4.4,1.9 30.6,1.9 ccw(c30.6,3.9) 32.6,3.9 32.6,23.9 ccw(c30.6,23.9) 30.6,25.9 4.4,25.9 ccw(c4.4,23.9) 2.4,23.9

## Keep-outs
Keep-Out Layer:
  the board outline again, w0.01

## Other copper
Top Layer:
  region net 5V: 21.283,9.972 21.283,12.825 ccw(c20.76,12.825) 21.13,13.195 cw(c21.446,13.511) 20.999,13.511 20.999,14.866 21.002,16.501 cw(c21.501,16.501) 21.501,17 23.75,17 ccw(c23.75,17.3) 24.05,17.3 24.05,17.757 cw(c24.313,17.757) 24.313,18.02 25.162,18.02 cw(c25.162,17.75) 25.432,17.75 25.432,17.568 cw(c25.283,17.568) 25.283,17.42 24.813,17.42 ccw(c24.813,17.097) 24.49,17.097 24.49,15.014 cw(c24.166,15.014) 24.166,14.69 23.45,14.69 cw(c23.45,14.89) 23.25,14.89 23.25,15.68 ccw(c23.05,15.68) 23.05,15.88 22.14,15.88 ccw(c22.14,15.7) 21.96,15.7 21.96,14.796 ccw(c22.609,14.796) 22.15,14.337 cw(c21.756,13.943) 22.313,13.943 22.313,12.17 ccw(c23.093,12.17) 23.093,11.39 24.312,11.39 cw(c24.312,11.221) 24.481,11.221 24.481,9.388 cw(c24.289,9.388) 24.289,9.196 21.837,9.196 cw(c21.837,9.75) 21.283,9.75

## Silkscreen, mask and mechanical layers (free items; w line width, h text height)
Top Overlay:
  region: 5254 vertices and 0 holes, not listed, extent 7.4,17.346 14.837,22.273
  text "u" at 30.214,13.53 h1
Bottom Overlay:
  region: 5254 vertices and 0 holes, not listed, extent 3.166,5.052 20.8,16.735
  text "Spider" at 31.542,19.256 h6
  text "v2" at 19.617,18.22 h3
  text "PA18" at 28.702,13.274 h2
  text "PA17" at 28.702,11.267 h2
  text "PA16" at 28.702,9.263 h2
  text "GND" at 28.702,7.253 h2
  text "5V" at 28.702,5.262 h2
  text "3V3" at 28.702,3.254 h2
  text "torbrodtkorb" at 9.913,2.712 h2
  text "g" at 11.575,2.525 h1.4
  text "24/3/22" at 16.726,2.522 h2
  text "Tor Brodtkorb" at 25.321,2.522 h2
Top Solder:
  region: 15.457,7.469 15.169,7.757 15.133,7.757 15.133,7.543 15.049,7.459 15.163,7.345 15.163,7.339
  region: 15.169,11.043 15.457,11.331 15.457,11.367 15.243,11.367 15.159,11.451 15.045,11.337 15.039,11.337
  region: 18.743,11.331 19.031,11.043 19.067,11.043 19.067,11.257 19.151,11.341 19.037,11.455 19.037,11.461
  region: 19.031,7.757 18.743,7.469 18.743,7.433 18.957,7.433 19.041,7.349 19.155,7.463 19.161,7.463